# Altium PCB AirSystem8266PCB.PcbDoc
Units mm, origin at the board's own origin, x right, y up, seen from the top; angles counter-clockwise.
Board outline 152.4 x 101.6 mm, 2 copper layers (Top Layer, Bottom Layer); 17 components, 21 nets, 53 pads, 0 vias.
Unrouted connection lines stored in the file: 29.
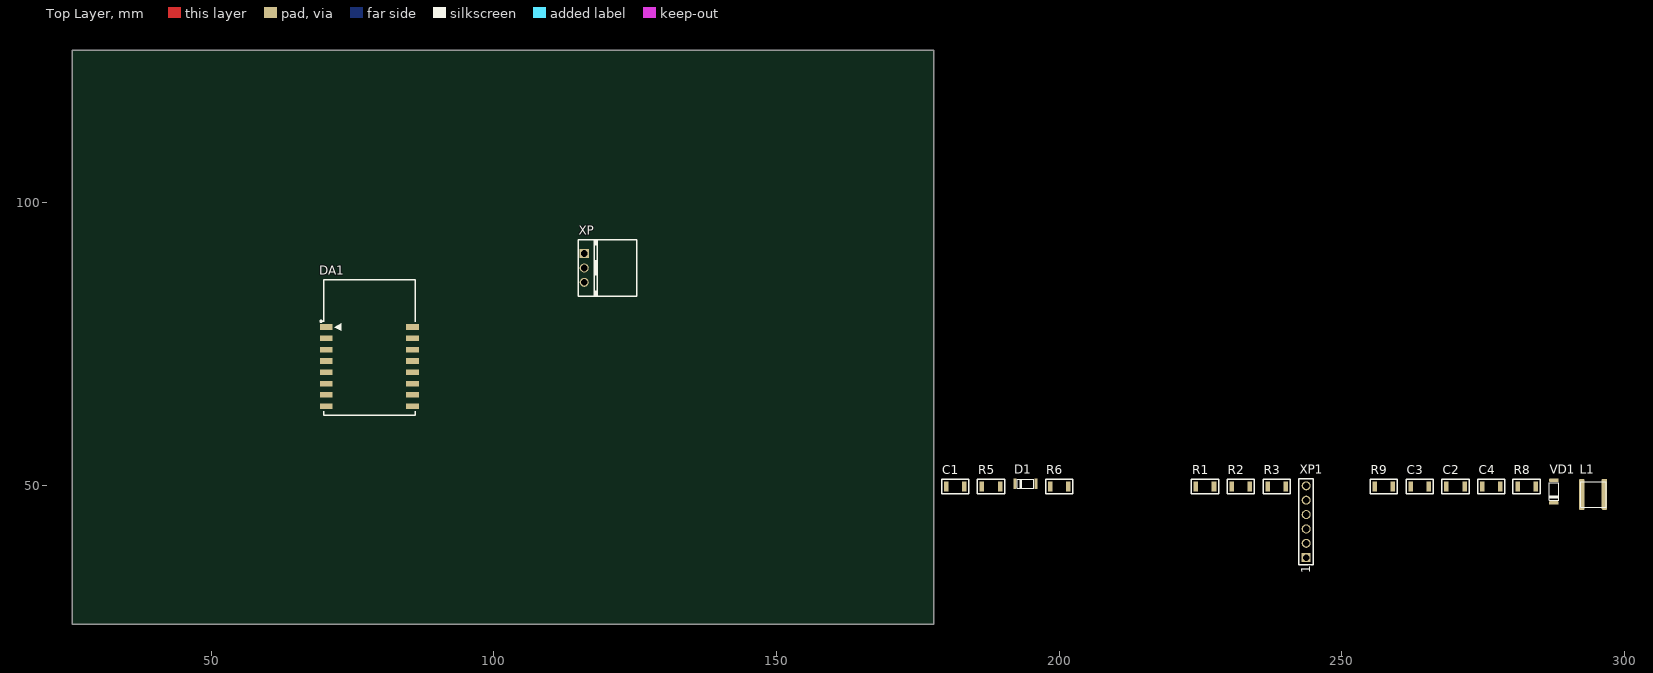
[diagram p0: Top Layer view]
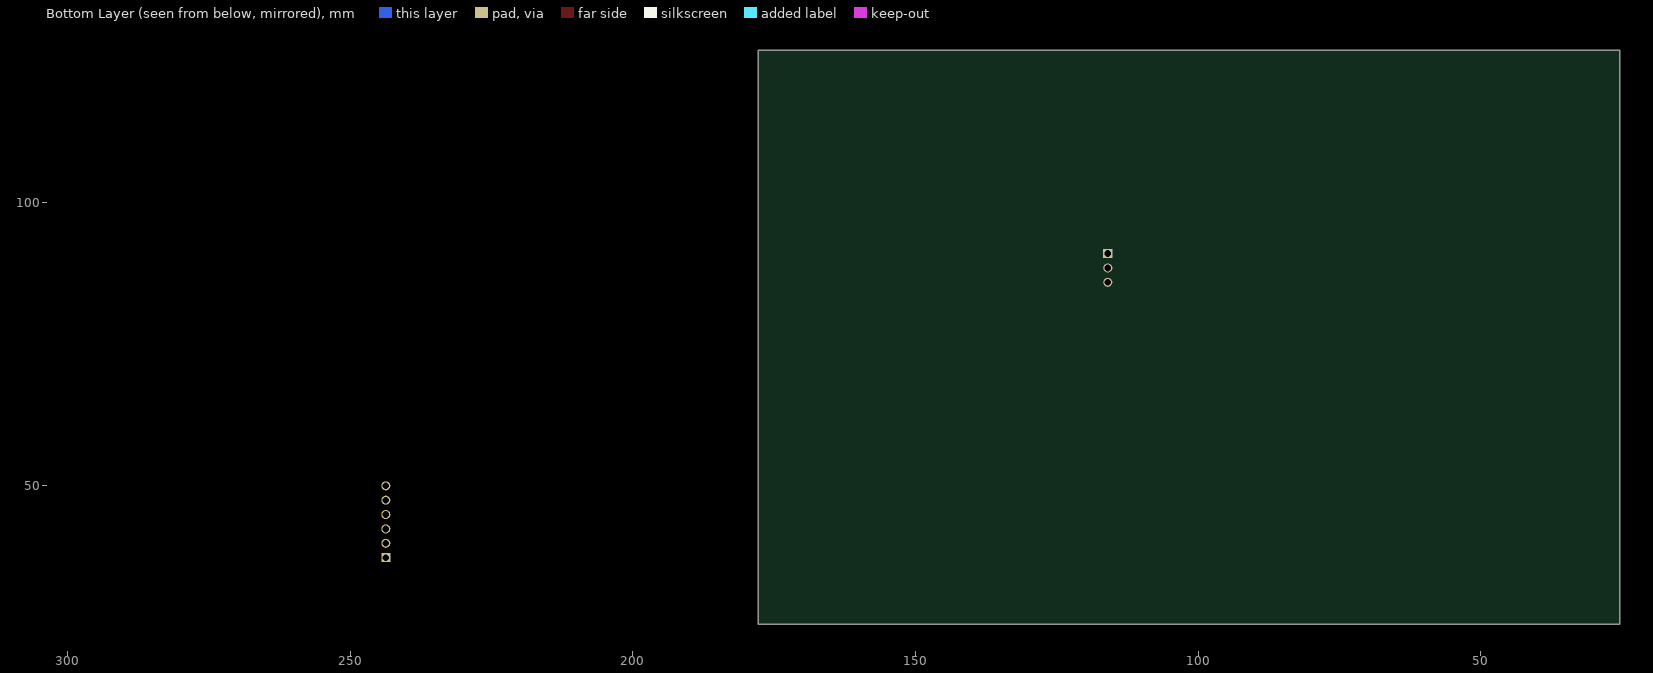
[diagram p1: Bottom Layer view, seen from below]

## Layer stack, top to bottom
Top Solder: solder mask 0.0102, Solder Resist, Dk 3.5
Top Layer: signal copper 0.0356
Dielectric 1: dielectric 0.32, FR-4, Dk 4.8
Bottom Layer: signal copper 0.0356
Bottom Solder: solder mask 0.0102, Solder Resist, Dk 3.5

## Board outline
25.4,25.4 177.8,25.4 177.8,127 25.4,127

## Design rules (kind name [scope] priority, off if disabled: settings)
Clearance [All] p1: gap=0.254
PolygonConnect [All] p1: connectstyle=Relief reliefconductorwidth=0.254 reliefentries=4 polygonreliefangle="90 Angle" airgapwidth=0.254
RoutingVias [All] p1: holewidth=0.711 width=1.27 viastyle="Through Hole" minholewidth=0.711 minwidth=1.27 maxholewidth=0.711 maxwidth=1.27
SolderMaskExpansion [All] p1: expansion=0.102
Width [All] p1: maxlimit=0.254 minlimit=0.254 preferedwidth=0.254
30 further rules are at their usual default settings.

## Components (designator, comment, footprint, x,y, rotation, side; value= is the part's Value field where it differs from the comment)
C1 "0.1u" C1206 181.61,49.784 r0 top
C2 "0.1u" C1206 270.129,49.784 r0 top
C3 "4.7u" C1206 263.779,49.784 r0 top
C4 "22u" C1206 276.479,49.784 r0 top
D1 "BL-LS1206UHR" BL-LC1206 194.056,50.292 r0 top
DA1 "ESP-12" ESP-12 70,78 r0 top
L1 "4.7uH" "SMD 5x5" 291.465,49.911 r0 top
R1 "10K" 1206 225.806,49.784 r0 top
R2 "10K" 1206 232.156,49.784 r0 top
R3 "10K" 1206 238.506,49.784 r0 top
R5 "10K" 1206 187.96,49.784 r0 top
R6 "500" 1206 200.025,49.784 r0 top
R8 "75K" 1206 282.702,49.784 r0 top
R9 "24K" 1206 257.429,49.784 r0 top
VD1 "DL4148" DO-213AA(SOD80) 287.528,48.895 r90 top
XP "PW10-3-M" PW10-3-M2 116,91 r270 top
XP1 "PLS-6" PLS-6_1 243.713,37.211 r90 top

## Footprints (in the part's own frame and the unit in brackets; to place one, negate y for a bottom-side part, rotate by r counter-clockwise, add the part's x,y. Pads: shape width x height; smd on the part's side, far side on the other; paste and mask are expansions set on the pad)
1206 [mm]
  rect 0.8x1.8 smd: 1(-1.6,0) 2(1.6,0)
  silkscreen extent -2.4,-1.3 2.4,1.3, body extent -2,-0.8 2,0.8, height 1.53
BL-LC1206 [mm]
  rect 0.5x1.8 smd: 1(-1.875,0) 2(1.875,0)
  silkscreen extent -1.43,-0.8 1.5,0.8, body extent -1.63,-0.8 1.63,0.8, height 1.15
C1206 [mm]
  rect 0.8x1.8 smd: 1(-1.6,0) 2(1.6,0)
  silkscreen extent -2.4,-1.3 2.4,1.3, body extent -2,-0.8 2,0.8, height 1.53
DO-213AA(SOD80) [mm]
  rrect50% 0.6x1.7 smd: 1(-2,0) 2(2,0)
  silkscreen extent -1.53,-0.85 1.53,0.85, body extent -1.75,-0.85 1.75,0.85, height 1.69
ESP-12 [mm]
  rect 2.25x1 smd: 1(0.375,0) 2(0.375,-2) 3(0.375,-4) 4(0.375,-6) 5(0.375,-8) 6(0.375,-10) 7(0.375,-12) 8(0.375,-14) 9(15.625,-14) 10(15.625,-12) 11(15.625,-10) 12(15.625,-8) 13(15.625,-6) 14(15.625,-4) 15(15.625,-2) 16(15.625,0)
  silkscreen extent -0.7,-15.57 16.08,8.37, body extent 0,-15.49 16,8.51, height 2.75
PLS-6_1 [mm]
  rect 1.6x1.6 hole 1.2: 1(0,0)
  round 1.6 hole 1.2: 2(2.54,0) 3(5.08,0) 4(7.62,0) 5(10.16,0) 6(12.7,0)
  silkscreen extent -1.27,-1.27 13.97,1.27
PW10-3-M2 [mm]
  rect 1.6x1.6 hole 1.2: 1(0,0)
  round 1.6 hole 1.2: 2(2.54,0) 3(5.08,0)
  silkscreen extent -2.45,-1.1 7.55,9.3, body extent -2.45,-1 7.55,9.3, height 3.7
"SMD 5x5" [mm]
  rrect50% 1x5.5 smd: 1(1,-1.5) 2(5,-1.5)
  silkscreen extent 0.8,-3.8 5.3,0.7, body extent 0.9,-3.7 5.2,0.6, height 3

## Part data
C1 C2 C3 C4: library part SMD_1206
D1: library part KP-3216SURCK
L1: library part "Smd 5x5"
R1 R2 R3 R5 R6 R8 R9: library part 1206

## Nets (pads, with @x,y where several pads share a name; then routed paths per layer and width w, separated by ;. In a path a pad name is that pad's centre, name@x,y a point inside that pad or via, vN(x,y) a via of type N, cw(c..) or ccw(c..) an arc to the next point about the centre after c; other vN are vias at no path point)
3V3: C1.1 C4.1 DA1.8 L1.2 R1.1 R2.1 R3.1 R8.2
5V: VD1.2 XP1.5
ADC: DA1.2
BTN: DA1.4
D12: DA1.6
D13: DA1.7
D14: DA1.5
GND: C1.2 C2.2 C3.2 C4.2 D1.1 DA1.9 R5.2 R9.1 XP1.6
NetD1_2: D1.2 R6.1
NetDA1_3: DA1.3 R1.2
NetDA1_10: DA1.10 R5.1
NetDA1_11: DA1.11 R6.2
NetDA1_12: DA1.12 R3.2 XP1.1
NetDA1_15: DA1.15 XP1.4
NetDA1_16: DA1.16 XP1.3
NetDA2_3: R8.1 R9.2
NetDA2_7: L1.1
RST: DA1.1 R2.2 XP1.2
SCL: DA1.14
SDA: DA1.13
VDD: C2.1 C3.1 VD1.1
pads on no net: XP.1 XP.2 XP.3

## Silkscreen, mask and mechanical layers (free items; w line width, h text height)
Mechanical 2:
  lines w0.254: 45,50 45,100 125,100 125,50 45,50

## Text inside footprints (layer, text, board x,y; h text height)
DA1: Mechanical 13 "ANTENNA AREA" at 70.127,85.874 h0.25; Mechanical 13 "CUTOUT POLYGON" at 70.127,85.366 h0.25
XP1: Top Overlay "1" at 244.475,34.417 h1.52 r90